# EAGLE board KKK_valdiklis (EAGLE 6.4)
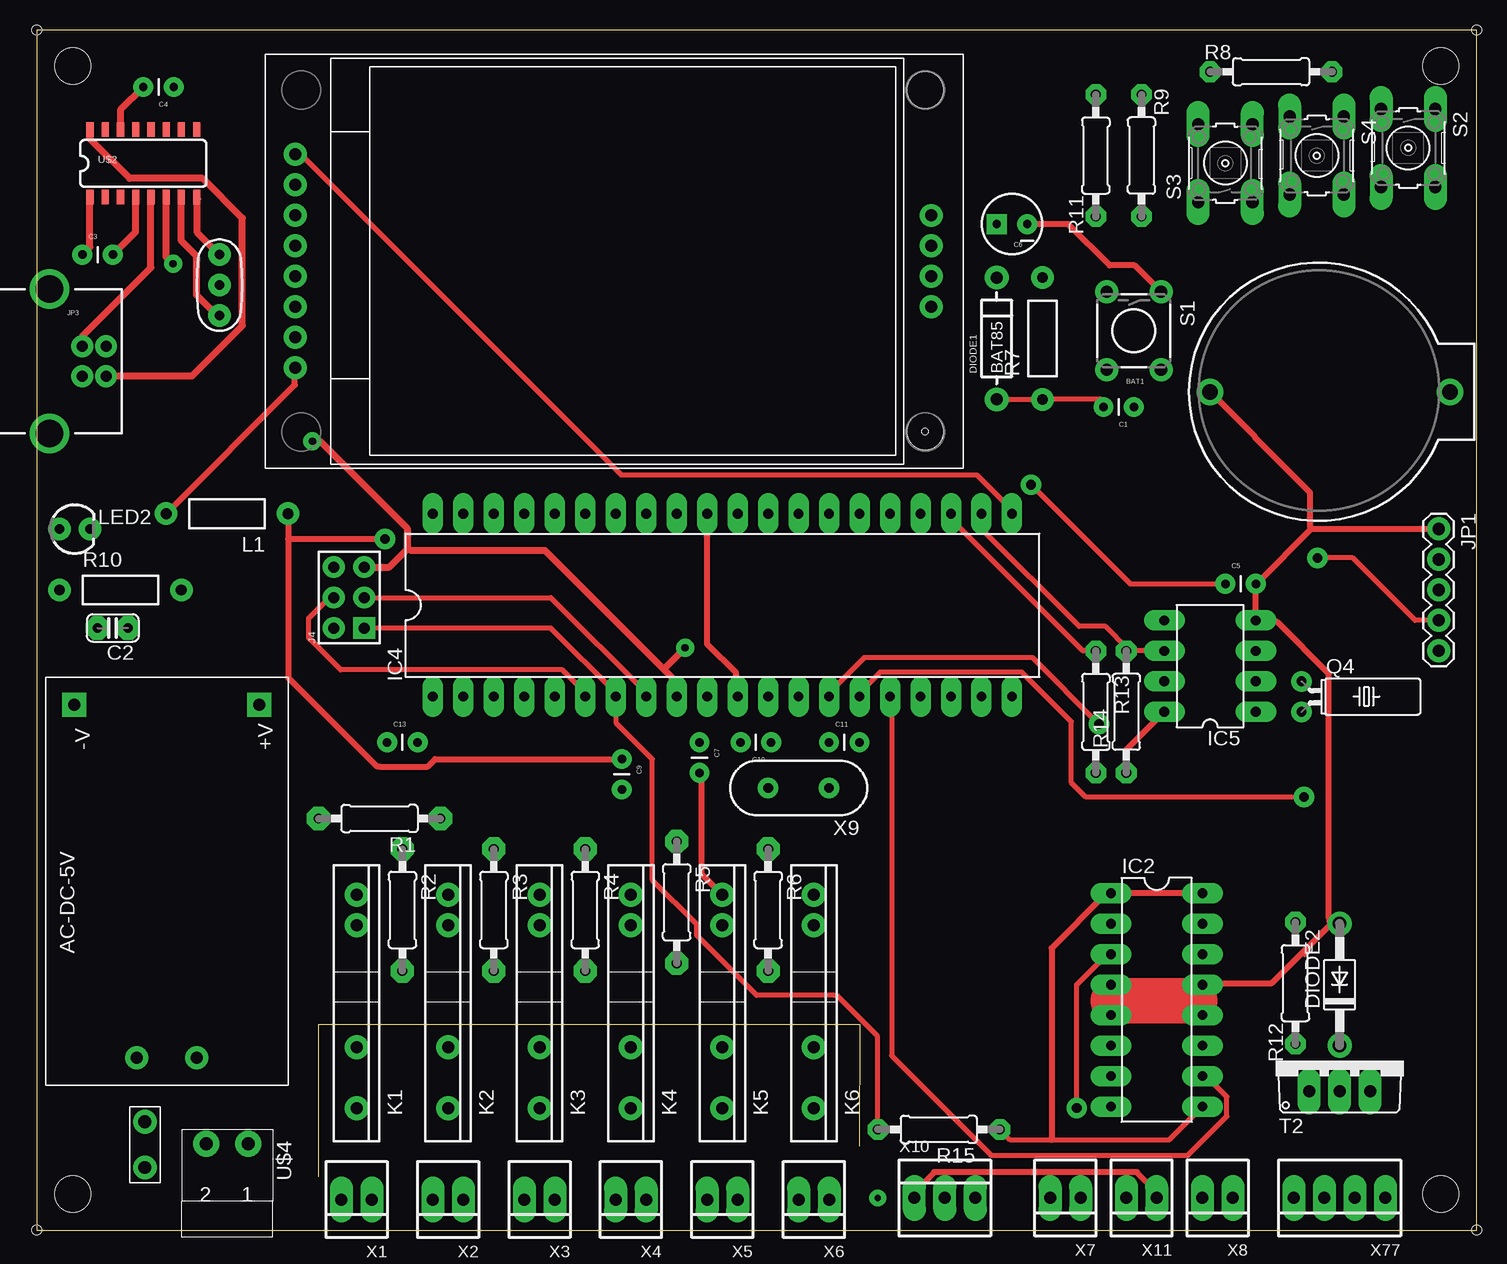
[diagram p0: board, top side]
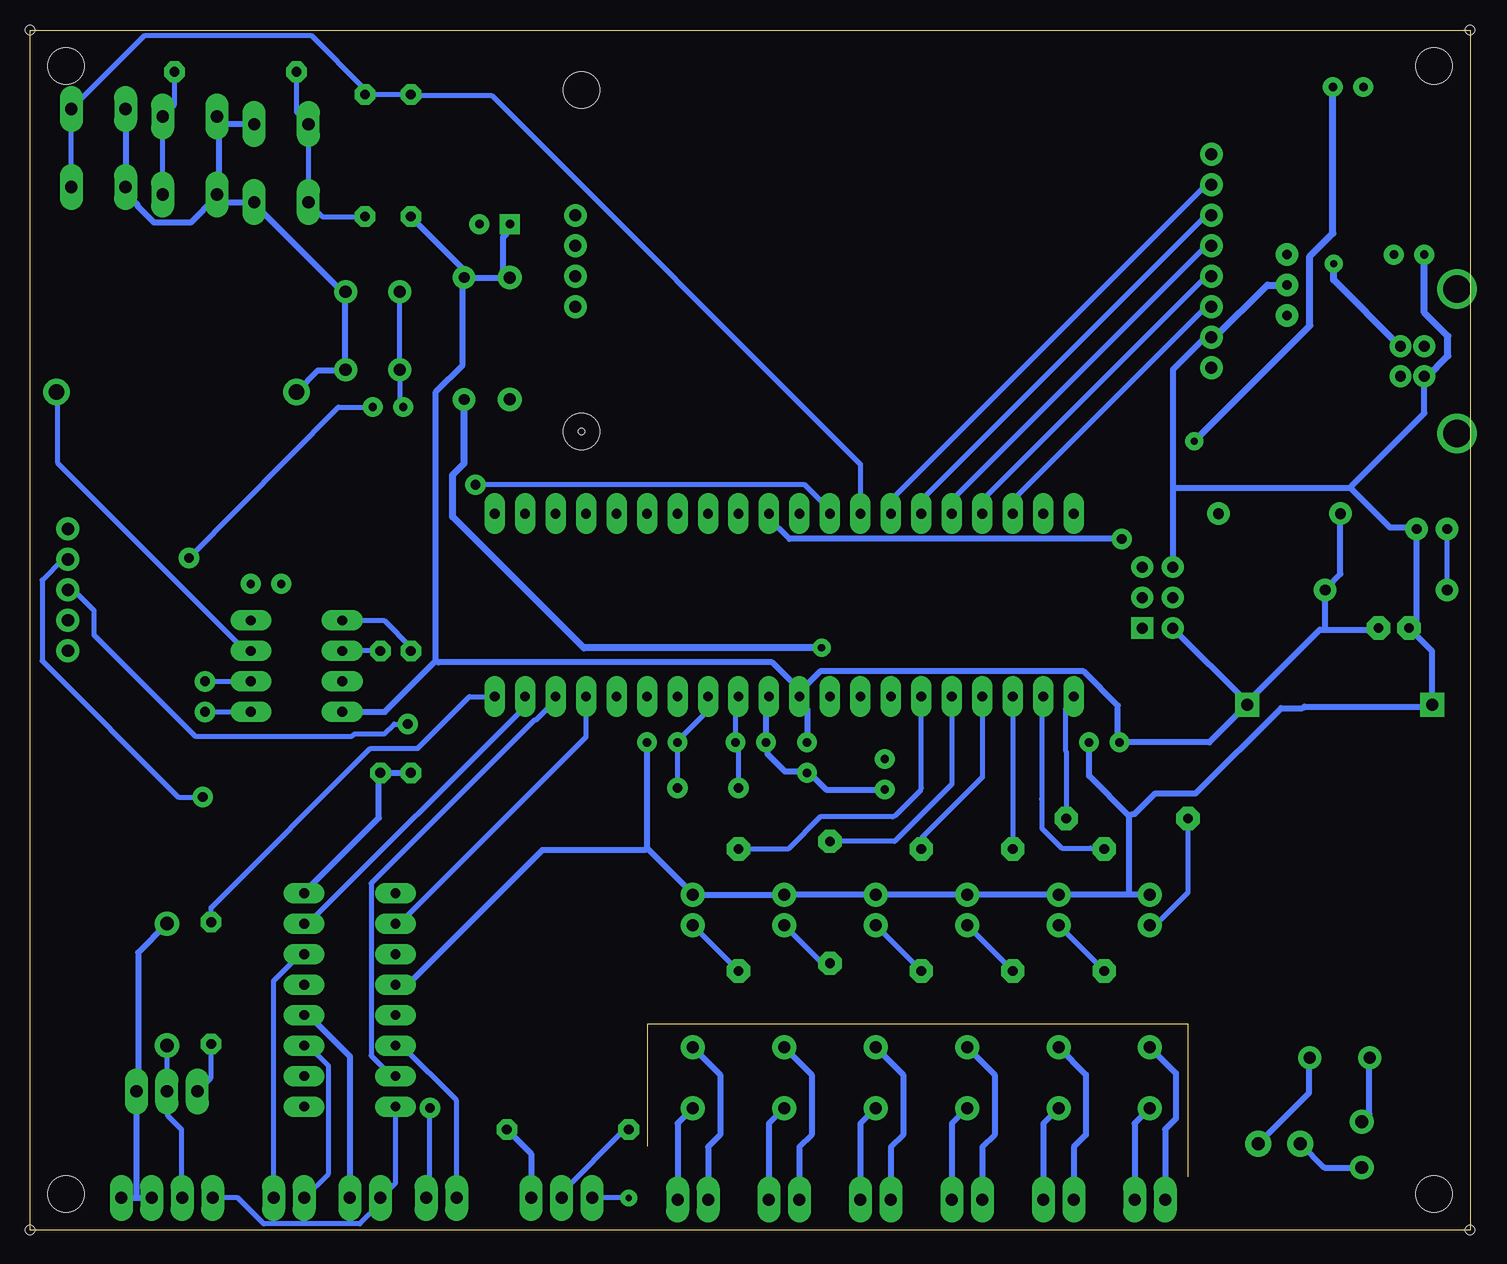
[diagram p1: board, bottom side, seen from below]

Size 120 x 100 mm. Coordinates in mm from the lower left corner, seen from the top.
Outline: 23.5,4.45 23.5,17.14 68.58,17.14 68.56,7
Outline: 0,0 120,0 120,100 0,100 0,0
Copper layers (1*16): Top 0.035mm / dielectric 1.5mm / Bottom 0.035mm
Design rules "SparkFun_SSOP16_Breakout_v10 *": minimum track width 0.6mm, minimum drill 0.6mm, track to track 0.6mm, track to pad 0.6mm, pad to pad 0.6mm, via to via 0.6mm, smd to smd 0.6mm, copper to edge 0.6mm, drill to drill 0.6mm, minimum pad ring 0.45mm, minimum via ring 0.45mm, stop-mask expansion 0.6mm, vias tented up to drill 0.6mm, thermal gap 0.6mm
Net classes: 1 vcc: width 0.5 mm; 4 gnd: width 0.5 mm; 5 220v: width 0.5 mm
Holes 0.51 mm at 74.04,66.55
Holes 3 mm at 74.04,66.55 74.04,95 3,97 117,97 3,3 117,3
Holes 0.8 mm at 0,0 0,100 120,100 120,0

## Footprints (pad centres in the part's own frame; a part is rotated, then mirrored left to right if it is on the bottom)
HLK-PM01_AC_DC = drill 1 pad 2 square: +V 31.7,2.4; -V 31.7,17.8 | drill 1: AC0 2.3,12.6; AC1 2.3,7.6
BATTCOM_20MM_PTH = drill 1.3: 1 20,0; 2 0,0
CAP-PTH-SMALL = drill 0.7 pad 1.651: 1 0,0; 2 2.54,0
C025-024X044 = drill 0.813 pad 1.93 octagon: 1 -1.27,0; 2 1.27,0
CPOL-RADIAL-10UF-25V = drill 0.7 pad 1.651 square: 1 1.27,0 | drill 0.7 pad 1.651: 2 -1.27,0
DIODE-TH-0.4 = drill 1 pad 1.981: A -5.08,0; C 5.08,0
DO41-10 = drill 1.118: A 5.08,0; C -5.08,0
DIL16 = drill 0.813 long: 1 -8.89,-3.81; 2 -6.35,-3.81; 3 -3.81,-3.81; 4 -1.27,-3.81; 5 1.27,-3.81; 6 3.81,-3.81; 7 6.35,-3.81; 8 8.89,-3.81; 9 8.89,3.81; 10 6.35,3.81; 11 3.81,3.81; 12 1.27,3.81; 13 -1.27,3.81; 14 -3.81,3.81; 15 -6.35,3.81; 16 -8.89,3.81
DIL40 = drill 0.813 long: 1 -24.13,-7.62; 2 -21.59,-7.62; 3 -19.05,-7.62; 4 -16.51,-7.62; 5 -13.97,-7.62; 6 -11.43,-7.62; 7 -8.89,-7.62; 8 -6.35,-7.62; 9 -3.81,-7.62; 10 -1.27,-7.62; 11 1.27,-7.62; 12 3.81,-7.62; 13 6.35,-7.62; 14 8.89,-7.62; 15 11.43,-7.62; 16 13.97,-7.62; 17 16.51,-7.62; 18 19.05,-7.62; 19 21.59,-7.62; 20 24.13,-7.62; 21 24.13,7.62; 22 21.59,7.62; 23 19.05,7.62; 24 16.51,7.62; 25 13.97,7.62; 26 11.43,7.62; 27 8.89,7.62; 28 6.35,7.62; 29 3.81,7.62; 30 1.27,7.62; 31 -1.27,7.62; 32 -3.81,7.62; 33 -6.35,7.62; 34 -8.89,7.62; 35 -11.43,7.62; 36 -13.97,7.62; 37 -16.51,7.62; 38 -19.05,7.62; 39 -21.59,7.62; 40 -24.13,7.62
DIL08 = drill 0.813 long: 1 -3.81,-3.81; 2 -1.27,-3.81; 3 1.27,-3.81; 4 3.81,-3.81; 5 3.81,3.81; 6 1.27,3.81; 7 -1.27,3.81; 8 -3.81,3.81
HEAD3X2 = drill 0.914 pad 1.778 square: 1 0,0 | drill 0.914 pad 1.778: 2 0,2.54; 3 2.54,0; 4 2.54,2.54; 5 5.08,0; 6 5.08,2.54
1X05 = drill 1.016 pad 1.88: 1 0,0; 2 2.54,0; 3 5.08,0; 4 7.62,0; 5 10.16,0
1X02_BIG = drill 1.067 pad 1.93: P$1 0,0; P$2 3.81,0
USB-B-PTH = drill 0.914 pad 1.676: D+ 0,1.25; D- 1.981,1.25; GND 0,-1.25; VBUS 1.981,-1.25 | drill 2.286: S1 -2.718,-6.02; S2 -2.718,6.02
S202T02 = drill 1 pad 2: A 10.16,0; DS1 -5.08,0; DS2 0,0; K 12.7,0
RES-AXIAL-0.4 = drill 0.9 pad 1.88: P$1 -5.08,0; P$2 5.08,0
LED3MM = drill 0.813 pad 1.88: A -1.27,0; K 1.27,0
TC38H = drill 0.813: 1 -1.27,0; 2 1.27,0
0207/10 = drill 0.813 pad 1.93 octagon: 1 -5.08,0; 2 5.08,0
0207/10' = drill 0.813 octagon: 1 -5.08,0; 2 5.08,0
0207/10'' = drill 0.813 pad 1.676 octagon: 1 -5.08,0; 2 5.08,0
TACTILE-PTH = drill 1.016 pad 1.88: 1 -3.251,2.261; 2 3.251,2.261; 3 -3.251,-2.261; 4 3.251,-2.261
B3F-10XX = drill 1.016 long: 1 -3.251,2.261; 2 3.251,2.261; 3 -3.251,-2.261; 4 3.251,-2.261
TO220AV = drill 1.016 long: B -2.54,-2.54; C 0,-2.54; E 2.54,-2.54
1.8"_TFT = drill 1 pad 1.778: P$3 55.5,21.05; P$4 55.5,18.52; P$5 55.5,15.98; P$6 55.5,13.44; P$9 2.5,26.14; P$10 2.5,23.6; P$11 2.5,21.06; P$12 2.5,18.52; P$13 2.5,15.98; P$14 2.5,13.44; P$15 2.5,10.9; P$16 2.5,8.36
SO016 = smd 0.6 x 1.2: 1 -4.445,-2.8; 2 -3.175,-2.8; 3 -1.905,-2.8; 4 -0.635,-2.8; 5 0.635,-2.8; 6 1.905,-2.8; 7 3.175,-2.8; 8 4.445,-2.8; 9 4.445,2.8; 10 3.175,2.8; 11 1.905,2.8; 12 0.635,2.8; 13 -0.635,2.8; 14 -1.905,2.8; 15 -3.175,2.8; 16 -4.445,2.8
2-3.50 = drill 1.1 pad 2.184: 1 2.05,1.2; 2 5.55,1.2
22-23-2021 = drill 1 long: 1 -1.27,0; 2 1.27,0
HC49US = drill 0.813: 1 -2.54,0; 2 2.54,0
22-23-2031 = drill 1 long: 1 -2.54,0; 2 0,0; 3 2.54,0
22-23-2041 = drill 1 long: 1 -3.81,0; 2 -1.27,0; 3 1.27,0; 4 3.81,0
RESONATOR-PTH = drill 0.8 pad 1.88: 1 -2.54,0; 2 0,0; 3 2.54,0

## Placement (x,y rotation side)
AC-DC-5V  HLK-PM01_AC_DC  [HLK-PM01_AC_DC]  20.95,12.06 90 top
BAT1  [BATTCOM_20MM_PTH]  97.79,69.85 0 top
C1  22p  [CAP-PTH-SMALL]  91.44,68.58 180 top
C2  [C025-024X044]  6.35,50.16 180 top
C3  100n  [CAP-PTH-SMALL]  3.81,81.28 0 top
C4  100n  [CAP-PTH-SMALL]  11.43,95.25 180 top
C5  100n  [CAP-PTH-SMALL]  99.06,53.85 0 top
C6  4u7  [CPOL-RADIAL-10UF-25V]  81.28,83.82 180 top
C7  100n  [CAP-PTH-SMALL]  55.24,40.64 270 top
C9  100n  [CAP-PTH-SMALL]  48.77,39.24 270 top
C10  22p  [CAP-PTH-SMALL]  61.21,40.64 180 top
C11  22p  [CAP-PTH-SMALL]  66.04,40.64 0 top
C13  100n  [CAP-PTH-SMALL]  29.21,40.64 0 top
DIODE1  BAT85  [DIODE-TH-0.4]  80.01,74.3 90 top
DIODE2  1N4004  [DO41-10]  108.58,20.45 90 top
IC2  L293D  [DIL16]  93.34,19.18 270 top
IC4  ATMEGA1284  [DIL40]  57.15,52.07 0 top
IC5  DS1307  [DIL08]  97.79,46.99 90 top
J4  HEAD3X2  [HEAD3X2]  27.3,50.16 90 top
JP1  [1X05]  116.84,58.42 270 top
JP2  M02PTH2  [1X02_BIG]  9.02,9.02 270 top
JP3  USB-B  [USB-B-PTH]  3.81,72.39 0 top
K1  S202T02  [S202T02]  26.67,15.24 90 top
K2  S202T02  [S202T02]  34.29,15.24 90 top
K3  S202T02  [S202T02]  41.91,15.24 90 top
K4  S202T02  [S202T02]  49.53,15.24 90 top
K5  S202T02  [S202T02]  57.15,15.24 90 top
K6  S202T02  [S202T02]  64.77,15.24 90 top
L1  10uH  [RES-AXIAL-0.4]  15.88,59.69 180 top
LED2  PWR  [LED3MM]  3.17,58.42 0 top
Q4  32.768  [TC38H]  105.41,44.45 270 top
R1  330  [0207/10]  28.57,34.29 180 top
R2  330  [0207/10]  30.48,26.67 270 top
R3  330  [0207/10]  38.1,26.67 270 top
R4  330  [0207/10]  45.72,26.67 270 top
R5  330  [0207/10]  53.34,27.3 270 top
R6  330  [0207/10]  60.96,26.67 270 top
R7  10k  [RES-AXIAL-0.4]  83.82,74.3 90 top
R8  3k3  [0207/10']  102.87,96.52 180 top
R9  1k  [0207/10']  92.08,89.53 90 top
R10  1k  [RES-AXIAL-0.4]  6.99,53.34 0 top
R11  2k  [0207/10']  88.27,89.53 270 top
R12  2k  [0207/10']  104.9,20.57 270 top
R13  2.2k  [0207/10'']  88.27,43.18 270 top
R14  2.2K  [0207/10'']  90.81,43.18 90 top
R15  4.7K  [0207/10'']  75.18,8.38 180 top
S1  RESET  [TACTILE-PTH]  91.44,74.93 270 top
S2  [B3F-10XX]  114.3,90.17 270 top
S3  [B3F-10XX]  99.06,88.9 90 top
S4  [B3F-10XX]  106.68,89.53 270 top
T2  TIP120V  [TO220AV]  108.58,14.1 0 top
U$1  1.8"_TFT  [1.8"_TFT]  19.05,63.5 0 top
U$2  CH340G  [SO016]  8.89,88.9 0 top
U$4  2-3.50  [2-3.50]  19.68,8.38 180 top
X1  Boiler pump  [22-23-2021]  26.67,2.54 180 top
X2  Storage tank pump  [22-23-2021]  34.29,2.54 180 top
X3  Radiator pump  [22-23-2021]  41.91,2.54 180 top
X4  4 way valve 1  [22-23-2021]  49.53,2.54 180 top
X5  4 way valve 2  [22-23-2021]  57.15,2.54 180 top
X6  Floor heating  [22-23-2021]  64.77,2.54 180 top
X7  motorized valve 1  [22-23-2021]  85.72,2.67 180 top
X8  motorized valve 2  [22-23-2021]  98.42,2.67 180 top
X9  16MHz  [HC49US]  63.5,36.83 180 top
X10  22-23-2031  [22-23-2031]  75.69,2.67 0 top
X11  +12V  [22-23-2021]  92.08,2.67 180 top
X77  PUMP1  [22-23-2041]  108.58,2.67 180 top
Y1  12mhz  [RESONATOR-PTH]  15.24,78.74 90 top

## Library data of the parts
AC-DC-5V = HLK-PM01
BAT1 = SparkFun-Electromechanical
C1 C10 C11 = SparkFun; OPTION: Do not fit for ceramic resonator
C2 = rcl-1
C3-C7 C9 C13 LED2 S1 X9 = SparkFun
DIODE1 L1 R7 R10 = SteveMarple
DIODE2 = diode
IC2 = st-microelectronics; MPN: L293D; OC_FARNELL: 9589619; OC_NEWARK: 56P8249
IC4 = SteveMarple; MPN: ATMEGA644-20PU; OC_FARNELL: 1288340; OC_NEWARK: 23M5060
IC5 R13-R15 = adafruit
J4 = MyCON2
JP1 JP2 = SparkFun-Connectors-1
JP3 = SparkFun-Connectors-1; PROD_ID: CONN-08278
K1-K6 = relay-1
Q4 = crystal
R1-R6 = resistor-1
R8 R9 R11 R12 = resistor
S2-S4 = switch-omron; MPN: B3F-1000; OC_FARNELL: 176432; OC_NEWARK: 36M3542
T2 = rocketfarm
U$1 = tft_1.8_1.44_oled_0.96
U$2 = ch340
U$4 = con-phoenix-350-1
X1-X8 X11 = con-molex; MF: MOLEX; MPN: 22-23-2021; OC_FARNELL: 1462926; OC_NEWARK: 25C3832
X10 = con-molex; MF: MOLEX; MPN: 22-23-2031; OC_FARNELL: 1462950; OC_NEWARK: 30C0862
X77 = con-molex; MF: MOLEX; MPN: 22-23-2041; OC_FARNELL: 1462920; OC_NEWARK: 38C0355
Y1 = SparkFun-FreqCtrl

## Nets
0(RX0): U$2.2
1(TX0): U$2.3
220V [220v]: AC-DC-5V.AC1 U$4.1
!RESET: C1.2 C4.1 DIODE1.A IC4.9 J4.5 R7.P$1 S1.3 S1.4
+5V [vcc]: JP3.VBUS U$2.16
+12V: IC2.8 X11.2 X77.4
A0: IC4.40
A1: IC4.39
A2: IC4.38 U$1.P$14
A3: IC4.37 U$1.P$13
A4: IC4.36 U$1.P$12
A5: IC4.35 U$1.P$11
A6: IC4.34 U$1.P$10
A7: IC4.33 R9.2 R11.1 S2.1 S2.2
AREF: C5.1 IC4.32
AVCC [vcc]: C9.1 IC4.30 L1.P$1
D0: IC4.1 R1.1
D1: IC4.2 R2.1
D2: IC4.3 R3.1
D3: IC4.4 R4.1
D4: IC4.5 R5.1
D5(MOSI): IC4.6 J4.4 R6.1
D6(MISO): IC4.7 J4.1 R15.2 X10.2
D7(SCK): IC4.8 J4.3
D8(RX0): IC4.14 JP1.3
D9(TX0): IC4.15 JP1.2
D10(RX1): IC2.10 IC4.16
D11(TX1): IC2.2 IC4.17
D12: IC2.7 IC4.18
D13: IC2.15 IC4.19
D14: IC4.20 R12.1
D15: IC4.21 U$1.P$9
D16(SCL): IC4.22 IC5.6 R14.2
D17(SDA): IC4.23 IC5.5 R13.1
D18(TCK): IC4.24
D19(TMS): IC4.25
D20(TDO): IC4.26
D21: IC4.27
D22: IC4.28
D23: IC4.29
DTR: C1.1 JP1.4
GND [vcc]: AC-DC-5V.-V BAT1.2 C2.2 C3.1 C5.2 C6.2 C7.2 C9.2 C10.2 C11.2 C13.2 DIODE2.A IC2.4 IC2.5 IC2.12 IC2.13 IC4.11 IC4.31 IC5.4 J4.6 JP1.1 JP3.GND K1.K K2.K K3.K K4.K K5.K K6.K LED2.K S1.1 S1.2 S2.3 S2.4 S3.3 S3.4 S4.3 S4.4 T2.E U$1.P$15 U$2.1 X10.1 X11.1 X77.1 X77.2 Y1.2
MV1.1: IC2.3 X7.1
MV1.2: IC2.6 X7.2
MV2.1: IC2.14 X8.1
MV2.2: IC2.11 X8.2
N$1: C11.1 IC4.13 X9.1
N$2: C10.1 IC4.12 X9.2
N$3 [220v]: AC-DC-5V.AC0 JP2.P$1
N$4 [220v]: JP2.P$2 U$4.2
N$6: R8.1 S4.1 S4.2
N$7: U$2.7 Y1.1
N$8: LED2.A R10.P$1
N$9: U$2.8 Y1.3
N$10: R8.2 R9.1 S3.1 S3.2
N$11: C4.2 U$2.14
N$12: JP3.D- U$2.6
N$13: R12.2 T2.B
N$14: C3.2 U$2.4
N$15: DIODE2.C T2.C X77.3
N$16: K3.A R3.2
N$18 [220v]: K3.DS1 X3.1
N$20: IC5.1 Q4.2
N$21: IC5.2 Q4.1
N$22: JP3.D+ U$2.5
N$23 [220v]: K3.DS2 X3.2
N$24: K2.A R2.2
N$25 [220v]: K2.DS1 X2.1
N$26 [220v]: K2.DS2 X2.2
N$27: BAT1.1 IC5.3
N$28: K4.A R4.2
N$29 [220v]: K4.DS1 X4.1
N$30 [220v]: K4.DS2 X4.2
N$31: K1.A R1.2
N$32 [220v]: K1.DS1 X1.1
N$33 [220v]: K1.DS2 X1.2
N$34: K6.A R6.2
N$35 [220v]: K6.DS1 X6.1
N$36 [220v]: K6.DS2 X6.2
N$37: K5.A R5.2
N$38 [220v]: K5.DS1 X5.1
N$39 [220v]: K5.DS2 X5.2
SQW: IC5.7
VCC [vcc]: AC-DC-5V.+V C2.1 C6.1 C7.1 C13.1 DIODE1.C IC2.1 IC2.9 IC2.16 IC4.10 IC5.8 J4.2 L1.P$2 R7.P$2 R10.P$2 R11.2 R13.2 R14.1 R15.1 U$1.P$16 X10.3

## Tracks (layer width: path | path; a pad name or v marks a point on that pad's centre or on a via)
220V
  Bottom 0.5: AC-DC-5V.AC1 13.4,14.35 13.4,11.43 17.59,7.24 U$4.1
!RESET  (via drill 0.6)
  Top 0.4: DIODE1.A R7.P$1 84.01,69.22 88.71,69.22 C1.2
  Top 0.6: v22.99,65.72 23.62,65.72 30.92,58.42 30.92,56.77 | 30.92,56.77 29.4,55.24 J4.5 | IC4.9 53.34,45.66 52.26,46.74 | 52.26,46.74 42.35,56.64 31.18,56.64 30.92,56.77 | v54.04,48.51 52.45,46.93 52.26,46.74
  Bottom 0.4: C1.2 89.15,68.83 89.15,71.63 S1.4 89.22,71.88 89.22,78.17 S1.3
  Bottom 0.6: C4.1 11.43,83.06 13.34,81.15 13.34,75.37 v22.99,65.72 | R7.P$1 83.82,63.88 84.77,62.93 84.77,59.44 73.85,48.51 v54.04,48.51
+5V
  Top 0.6: U$2.16 4.45,90.93 7.75,87.63 13.84,87.63 17.14,84.33 17.14,75.37 12.95,71.18 5.84,71.18 JP3.VBUS
+12V
  Bottom 0.4: IC2.8 89.53,3.94 X11.2 90.87,2.48 90.87,2.16 92.52,0.51 100.52,0.51 102.68,2.67 X77.4
A2
  Bottom 0.4: IC4.38 38.1,60.83 22.04,76.9 21.59,76.9 U$1.P$14
A3
  Bottom 0.4: IC4.37 40.64,60.83 22.04,79.44 21.59,79.44 U$1.P$13
A4
  Bottom 0.4: IC4.36 43.18,60.83 22.04,81.98 21.59,81.98 U$1.P$12
A5
  Bottom 0.4: IC4.35 45.72,60.83 22.04,84.52 21.59,84.52 U$1.P$11
A6
  Bottom 0.4: IC4.34 48.26,60.83 22.04,87.06 21.59,87.06 U$1.P$10
A7
  Bottom 0.4: S2.2 116.59,86.93 116.59,93.22 S2.1 116.52,93.47 110.49,99.5 96.52,99.5 92.14,95.12 92.14,94.81 R9.2 88.46,94.61 R11.1 88.08,94.55 81.53,94.55 50.8,63.82 IC4.33
AREF  (via drill 0.8)
  Top 0.4: C5.1 91.12,53.85 v82.87,62.1
  Bottom 0.4: v82.87,62.1 55.44,62.1 53.34,60.01 IC4.32
AVCC  (via drill 0.8)
  Top 0.5: L1.P$1 20.95,57.59 | 20.95,57.59 20.95,46.04 28.38,38.61 28.57,38.61 32.58,38.61 33.21,39.24 C9.1 | v29.02,57.59 21.14,57.59 20.95,57.59
  Bottom 0.5: IC4.30 58.42,59.31 56.71,57.59 v29.02,57.59
D0
  Bottom 0.4: R1.1 33.66,39.88 33.72,39.94 33.72,43.43 33.02,44.13 IC4.1
D1
  Bottom 0.4: R2.1 31.43,31.75 31.62,31.81 34.04,31.81 35.69,33.47 35.69,35.81 35.69,36.01 35.69,44.32 IC4.2
D2
  Bottom 0.4: IC4.3 R3.1
D3
  Bottom 0.4: R4.1 45.72,32.64 40.64,37.72 IC4.4
D4
  Bottom 0.4: R5.1 47.94,32.38 43.18,37.15 IC4.5
D5(MOSI)
  Top 0.4: J4.4 24.38,52.7 22.67,50.99 22.67,49.34 25.34,46.67 43.81,46.67 45.72,44.77 IC4.6
  Bottom 0.4: IC4.6 45.72,36.83 45.78,36.64 47.94,34.48 48.13,34.42 54.17,34.42 56.83,31.75 R6.1
D6(MISO)
  Top 0.4: J4.1 42.86,50.16 48.26,44.77 IC4.7 48.32,44.26 48.32,42.23 51.31,39.24 51.31,29.15 54.99,25.46 54.99,24.57 60.01,19.56 66.48,19.56 66.67,19.56 70.04,16.19 70.04,8.57 R15.2 70.23,8.57
  Bottom 0.4: X10.2 75.69,3.11 70.42,8.38 R15.2
D7(SCK)
  Top 0.4: IC4.8 50.8,44.77 42.86,52.7 J4.3
D8(RX0)  (via drill 0.8)
  Top 0.4: IC4.14 66.04,44.77 68.96,47.69 83,47.69 v88.52,42.16
  Bottom 0.4: v88.52,42.16 89.66,42.16 90.49,41.34 92.96,41.34 93.15,41.15 106.24,41.15 114.68,49.59 114.68,51.63 116.39,53.34 JP1.3
D9(TX0)  (via drill 0.8)
  Top 0.4: IC4.15 68.58,44.77 70.29,46.48 82.11,46.48 86.23,42.35 86.23,37.27 87.44,36.07 v105.6,36.07
  Bottom 0.4: v105.6,36.07 107.63,36.07 119,47.43 119,54.17 117.28,55.88 JP1.2
D10(RX1)
  Top 0.4: IC2.10 97.47,12.83 99.19,11.11 99.19,9.46 95.95,6.22 79.57,6.22 71.25,14.54 71.25,44.32 IC4.16
D11(TX1)
  Bottom 0.4: IC4.17 73.66,41.08 89.22,25.53 IC2.2
D12
  Bottom 0.4: IC2.7 89.85,12.83 91.57,14.54 91.57,28.89 77.98,42.48 77.85,42.48 76.2,44.13 IC4.18
D13
  Bottom 0.4: IC2.15 96.84,25.53 78.74,43.62 IC4.19
D14
  Bottom 0.4: IC4.20 83.38,44.45 87.69,40.13 91.63,40.13 104.9,26.86 R12.1
D15
  Top 0.4: 81.28,60.01 IC4.21 81.15,60.13 78.36,62.93 48.7,62.93 22.04,89.6 21.59,89.6 U$1.P$9
D16(SCL)
  Top 0.4: IC5.6 R14.2 90.93,48.45 89.09,50.29 86.87,50.29 78.74,58.42 IC4.22
  Bottom 0.4: R14.2 IC5.6
D17(SDA)
  Top 0.4: IC4.23 76.2,59.5 76.77,58.93 76.77,58.67 87.19,48.26 R13.1
  Bottom 0.4: R13.1 88.27,48.58 90.49,50.8 IC5.5
DTR  (via drill 0.8)
  Top 0.4: v106.74,56.01 109.67,56.01 114.87,50.8 JP1.4
  Bottom 0.4: C1.1 94.3,68.58 v106.74,56.01
GND
  Top 0.5: 93.73,78.17 S1.1 93.53,78.36 91.5,80.39 89.41,80.39 85.98,83.82 C6.2 | 93.73,71.88 S1.2 | IC2.5 IC2.4 89.72,19.11 | IC2.13 IC2.12 | DIODE2.A 107.89,25.53 105.5,23.15 | 105.5,23.15 102.93,20.57 97.35,20.57 IC2.13 | 105.66,22.99 105.5,23.15 | 96.52,19.11 IC2.13 | IC4.31 55.88,48.83 58.29,46.42 58.29,44.64 IC4.11 | 54.99,38.1 C7.2 55.44,37.72 55.44,29.65 K5.K | 107.76,25.72 DIODE2.A | DIODE2.A 107.7,25.97 107.7,46.35 103.38,50.67 101.79,50.67 IC5.4 101.6,51.05 C5.2 101.79,53.98 106.24,58.42 | BAT1.2 101.47,66.17 101.6,65.98 106.11,61.47 106.11,58.61 106.24,58.42 | 106.24,58.42 JP1.1 | X10.1 73.15,3.17 74.8,4.83 91.69,4.83 93.34,3.17 X11.1
  Top 0.6: C3.1 4.45,81.92 4.45,86.04 U$2.1
  Top 3.81: 96.52,19.11 89.72,19.11
  Bottom 0.406: 70.23,2.67 X10.1
  Bottom 0.5: 28.38,27.94 26.86,27.94 K1.K | 28.38,27.94 K2.K 34.48,27.94 K3.K 42.1,27.94 K4.K 49.72,27.94 56.96,27.94 K5.K 57.34,27.94 64.58,27.94 K6.K 64.9,28.13 68.58,31.81 | S2.3 112.01,93.41 112.01,86.93 S2.4 112.01,86.68 112.01,86.42 111.06,85.47 111.06,85.34 109.67,83.95 106.62,83.95 104.52,86.04 S4.4 | S4.4 104.39,86.23 103.82,85.66 101.35,85.66 S3.3 101.16,85.47 101.16,85.34 93.98,78.17 S1.1 93.73,78.17 93.73,71.88 S1.2 93.73,71.63 96.01,71.63 BAT1.2 | S3.4 101.35,92.2 103.82,92.2 104.39,92.77 S4.3 103.95,92.01 104.27,91.69 104.27,86.49 S4.4 | X77.1 111.12,2.67 | 111.12,2.67 X77.2 | 111.12,2.67 111.12,2.86 T2.E 111,11.75 111,23.11 DIODE2.A | 24.77,61.85 24.77,71.69 22.1,74.36 21.78,74.36 U$1.P$15 | 24.77,61.85 J4.6 | C13.2 31.75,37.85 28.38,34.48 | 28.38,34.48 28.38,28.13 28.38,27.94 | 9.97,61.85 6.67,58.55 4.64,58.55 LED2.K 4.45,49.85 C2.2 3.17,48.26 3.17,43.81 AC-DC-5V.-V 3.37,43.62 13.78,43.62 13.97,43.5 15.75,43.5 22.86,36.39 26.23,36.39 27.94,34.67 28.19,34.61 28.38,34.48 | 9.97,61.85 24.57,61.85 24.77,61.85 | IC4.11 58.67,44.2 C10.2 58.55,40.45 58.55,39.69 57.09,38.23 55.44,38.23 C7.2 54.99,38.04 53.66,36.7 C9.2 | 68.58,31.81 C11.2 | IC2.4 88.52,20.45 77.28,31.69 68.77,31.69 68.58,31.81 | X11.1 93.34,14.48 96.77,17.91 IC2.12 | JP3.GND 3.81,71.12 3.81,68.07 9.84,62.04 9.97,61.85
  Bottom 0.6: C3.1 3.81,76.45 1.84,74.49 1.84,72.83 3.62,71.06 JP3.GND | Y1.2 16.89,78.74 21.34,74.3 U$1.P$15
MV1.1  (via drill 0.8)
  Top 0.4: IC2.3 89.22,22.99 86.68,20.45 v86.68,10.16
  Bottom 0.4: v86.68,10.16 86.68,2.98 X7.1
MV1.2
  Bottom 0.4: IC2.6 89.03,15.37 84.45,10.79 X7.2
MV2.1
  Bottom 0.4: IC2.14 97.47,22.99 99.69,20.77 X8.1
MV2.2
  Bottom 0.4: IC2.11 96.84,15.37 95.12,13.65 95.12,4.7 X8.2
N$1
  Bottom 0.4: X9.1 C11.1 65.98,40.83 63.5,43.31 IC4.13
N$2
  Bottom 0.4: IC4.12 61.21,44.2 C10.1 61.15,40.45 60.96,40.26 X9.2
N$3
  Bottom 0.5: JP2.P$1 8.38,9.65 8.38,14.35 AC-DC-5V.AC0
N$4
  Bottom 0.5: JP2.P$2 12.13,5.21 14.1,7.18 U$4.2
N$5  (via drill 0.51)
  other vias: 70.1,2.67
N$6
  Bottom 0.4: R8.1 107.95,93.79 108.9,92.84 S4.1 108.97,92.58 108.97,86.3 S4.2
N$7
  Top 0.6: Y1.1 15.05,76.2 13.34,77.92 13.34,81.15 12.06,82.42 12.06,86.04 U$2.7
N$8
  Bottom 0.4: R10.P$1 LED2.A
N$9
  Top 0.3: 13.34,86.04 U$2.8
  Top 0.6: Y1.3 13.4,83.12 13.4,85.92 U$2.8
N$10
  Bottom 0.4: R8.2 97.79,93.15 96.84,92.2 S3.2 96.77,91.95 96.77,85.79 S3.1 96.77,85.6 95.63,84.45 R9.1
N$11
  Top 0.6: C4.2 6.99,93.34 6.99,91.76 U$2.14
N$12  (via drill 0.6)
  Top 0.6: v11.37,80.52 10.79,81.09 10.79,86.04 U$2.6
  Bottom 0.6: v11.37,80.52 11.37,79.18 5.84,73.66 JP3.D-
N$13
  Bottom 0.4: R12.2 104.9,12.7 T2.B
N$14
  Top 0.6: C3.2 8.26,83.19 8.26,86.04 U$2.4
N$15
  Bottom 0.4: DIODE2.C T2.C 108.52,11.37 108.52,9.53 107.38,8.38 107.38,2.86 X77.3
N$16
  Bottom 0.4: K3.A R3.2
N$18
  Bottom 0.5: X3.1 43.18,8.89 K3.DS1
N$20
  Bottom 0.4: Q4.2 IC5.1
N$21
  Bottom 0.4: Q4.1 IC5.2
N$22
  Top 0.6: U$2.5 9.53,86.04 9.53,80.2 3.81,74.49 3.81,73.66 JP3.D+
N$23
  Bottom 0.5: X3.2 40.64,6.92 39.62,7.94 39.62,12.95 K3.DS2
N$24
  Bottom 0.4: K2.A R2.2
N$25
  Bottom 0.5: X2.1 35.56,8.89 K2.DS1
N$26
  Bottom 0.5: X2.2 33.02,6.92 32,7.94 32,12.95 K2.DS2
N$27
  Bottom 0.4: IC5.3 101.79,48.26 102.36,48.83 102.62,48.83 117.73,63.94 117.73,69.85 BAT1.1
N$28
  Bottom 0.4: K4.A R4.2
N$29
  Bottom 0.5: X4.1 50.8,8.89 K4.DS1
N$30
  Bottom 0.5: X4.2 48.26,6.92 47.24,7.94 47.24,12.95 K4.DS2
N$31
  Bottom 0.4: R1.2 23.5,28.13 26.23,25.4 K1.A
N$32
  Bottom 0.5: X1.1 27.94,8.89 K1.DS1
N$33
  Bottom 0.5: X1.2 25.4,8.38 24.51,9.27 24.51,13.08 K1.DS2
N$34
  Bottom 0.4: K6.A R6.2
N$35
  Bottom 0.5: X6.1 66.04,8.89 K6.DS1
N$36
  Bottom 0.5: X6.2 63.5,6.92 62.48,7.94 62.48,12.95 K6.DS2
N$37
  Bottom 0.4: R5.2 53.34,21.59 K5.A
N$38
  Bottom 0.5: X5.1 58.42,8.89 K5.DS1
N$39
  Bottom 0.5: X5.2 55.88,6.92 54.86,7.94 54.86,12.95 K5.DS2
VCC
  Top 0.406: IC2.9 94.36,7.49 84.58,7.49 82.93,7.49 81.15,7.49 R15.1
  Top 0.5: R14.1 90.81,40.01 IC5.8 | L1.P$2 21.53,70.42 21.53,71.82 U$1.P$16 | IC2.16 IC2.1 89.34,27.94 89.03,27.94 84.58,23.5 84.58,7.68 84.58,7.49
  Bottom 0.5: R7.P$2 83.63,79.38 DIODE1.C 80.58,79.57 80.58,82.74 80.01,83.31 80.01,83.5 C6.1 | R13.2 R14.1 90.93,37.91 90.93,34.35 97.03,28.26 IC2.16 | 86.17,47.43 86.17,69.85 83.95,72.07 83.95,79.18 R7.P$2 | 86.17,47.43 90.42,43.18 IC5.8 | AC-DC-5V.+V 18.61,43.75 21.72,40.64 C13.1 29.34,40.83 29.34,43.69 32.19,46.55 54.17,46.55 55.75,44.96 55.75,44.64 IC4.10 | J4.2 18.61,44.01 AC-DC-5V.+V | 12.06,50.04 12.51,50.04 18.41,44.13 AC-DC-5V.+V | 12.06,50.04 7.81,50.04 C2.1 | 86.17,47.43 85.98,47.31 58.17,47.31 55.94,45.09 IC4.10 | R11.2 83.38,79.57 R7.P$2 | 12.06,50.04 12.06,50.23 R10.P$2 11.94,53.53 10.79,54.67 L1.P$2 | X10.3 78.23,6.35 R15.1 | C7.1 55.24,43.43 55.88,44.07 55.88,44.2 IC4.10